# Altium PCB 触摸4B开漏.PCBDOC (part 1 of 2)
Units mm, origin at the board's own origin, x right, y up, seen from the top; angles counter-clockwise.
Board outline 63.63 x 54.48 mm, 2 copper layers (Top Layer, Bottom Layer); 18 components, 31 nets, 63 pads, 27 vias.
Unrouted connection lines stored in the file: 1.
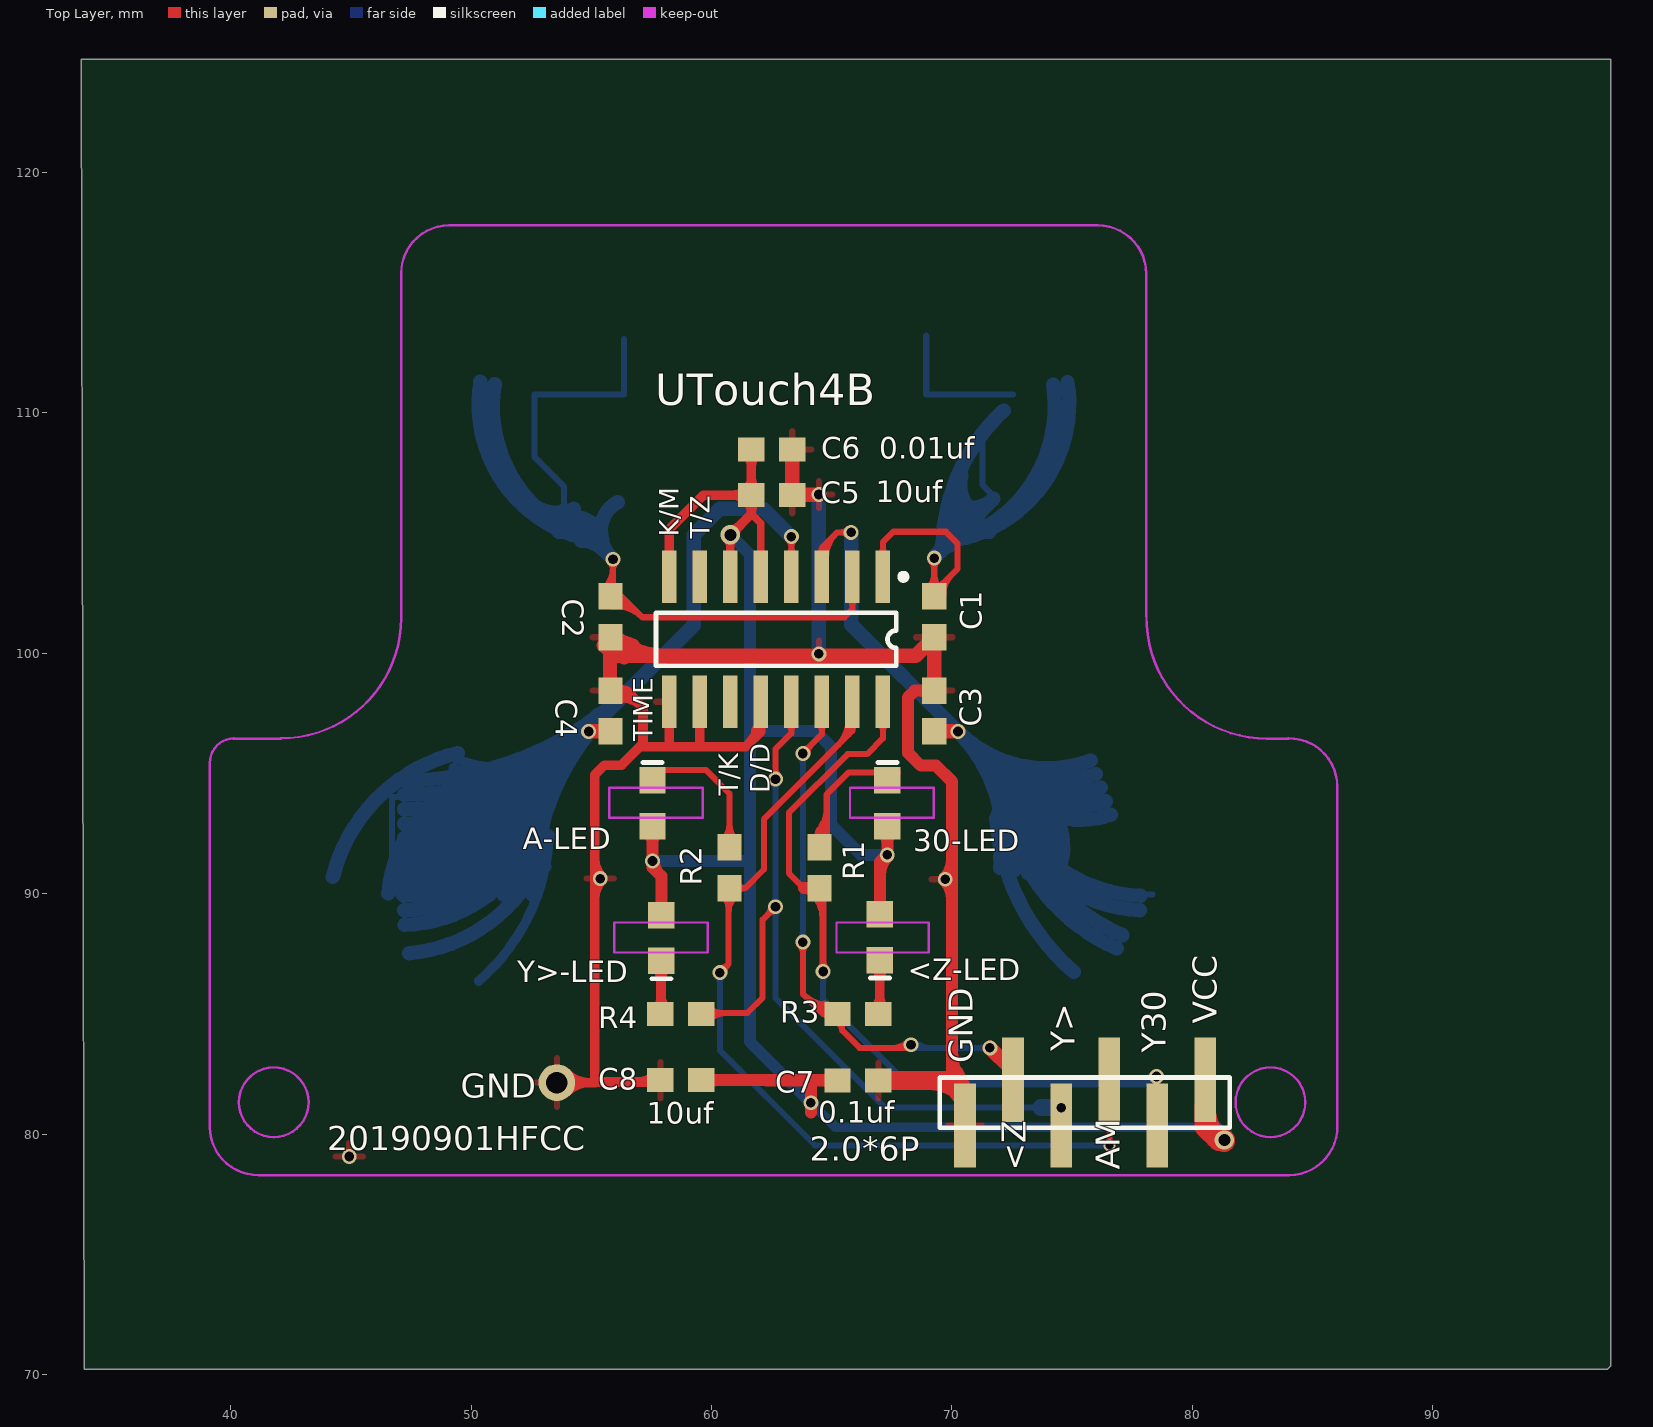
[diagram p0: Top Layer view]
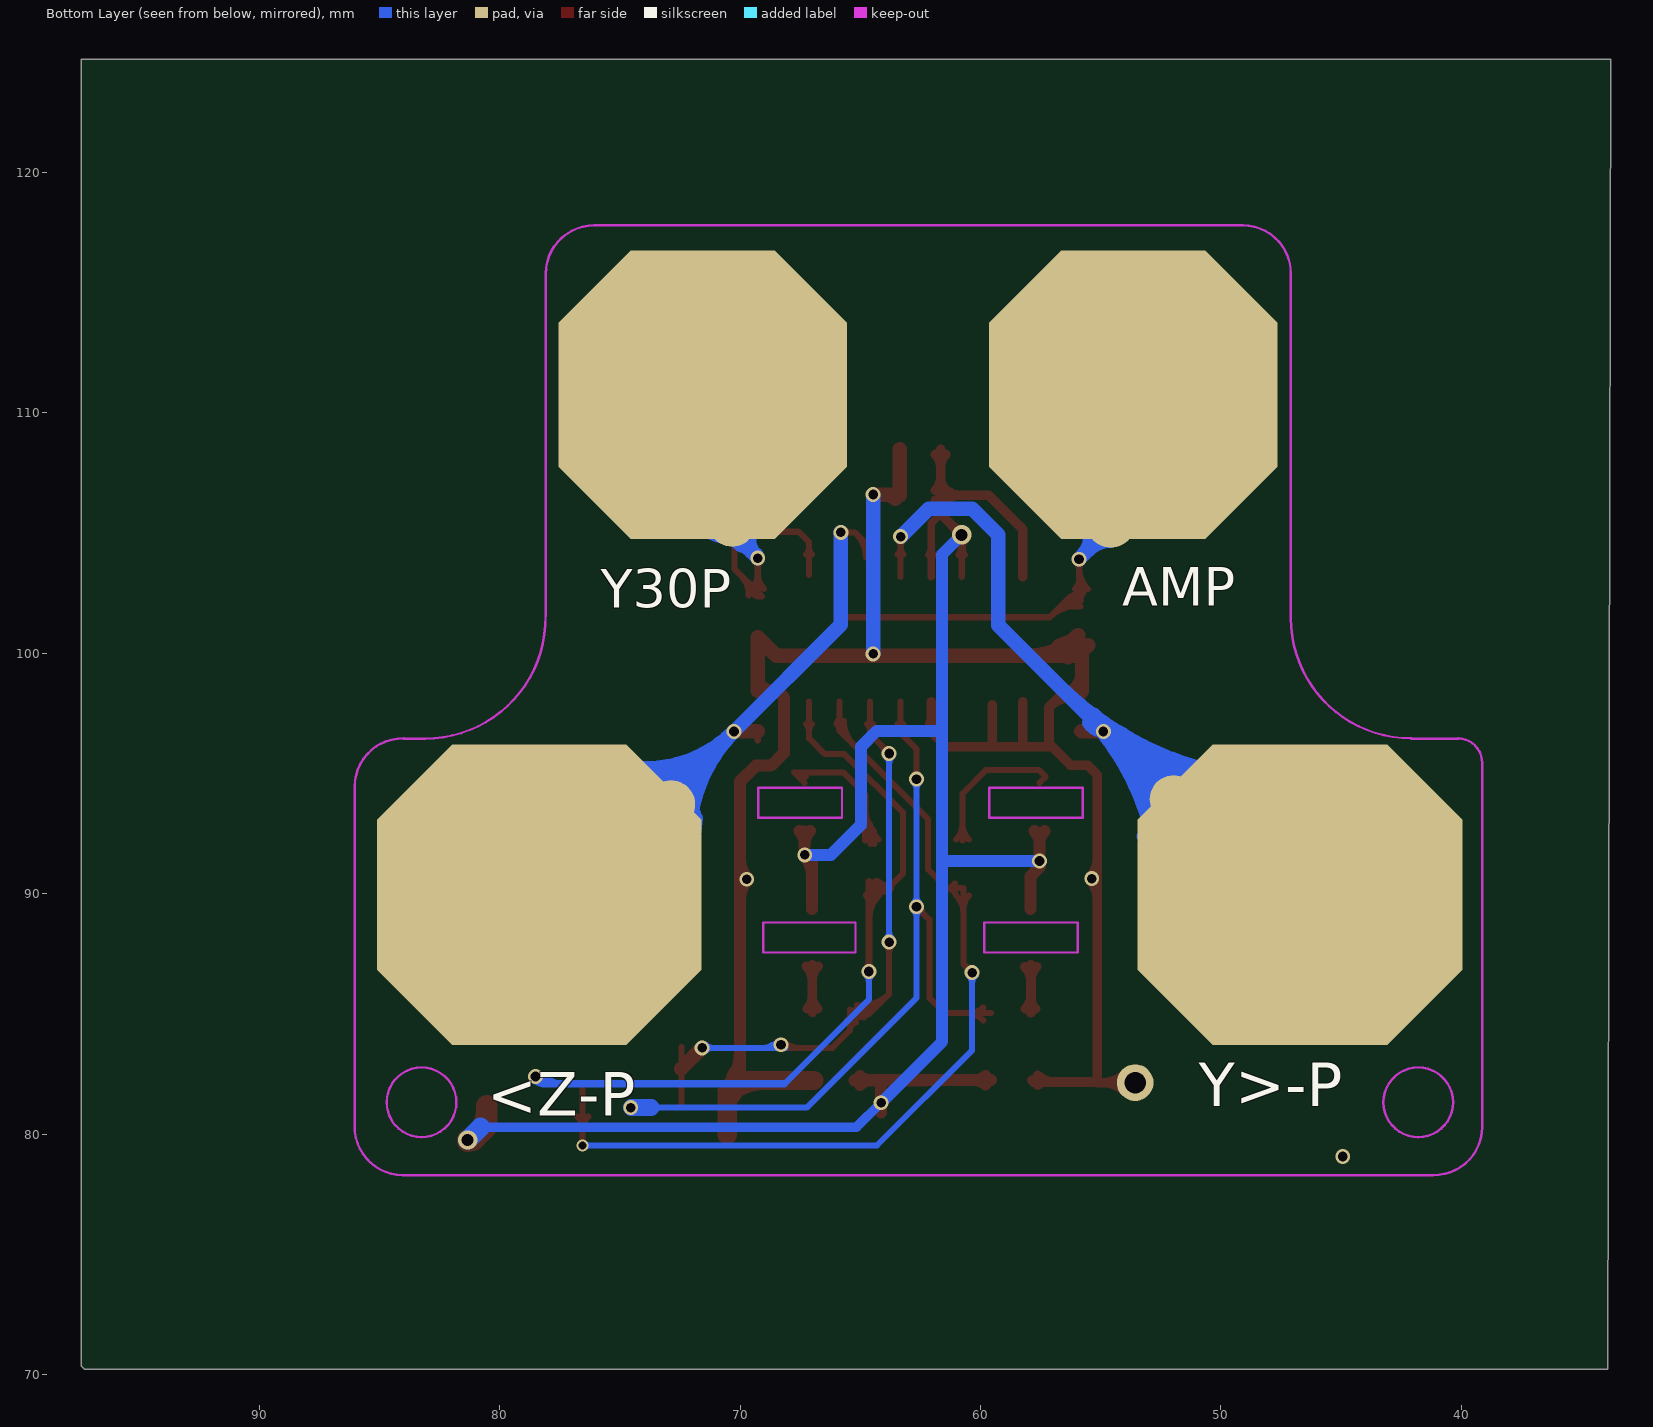
[diagram p1: Bottom Layer view, seen from below]

## Layer stack, top to bottom
Top Layer: signal copper 0.0356
Dielectric: dielectric 0.32, FR-4, Dk 4.8
Bottom Layer: signal copper 0.0356

## Board outline
33.782,124.714 97.409,124.714 97.409,70.358 97.282,70.231 33.909,70.231

## Design rules (kind name [scope] priority, off if disabled: settings)
Clearance [All] p1: gap=0.254
PolygonConnect [All] p1: connectstyle=Relief reliefconductorwidth=0.254 reliefentries=4 polygonreliefangle="90 Angle"
RoutingVias [All] p1: holewidth=0.4 width=0.62 viastyle="Through Hole" minholewidth=0.4 minwidth=0.6 maxholewidth=0.5 maxwidth=1
SilkscreenOverComponentPads [All] p1: minsilkscreentomaskgap=0.254
SolderMaskExpansion [All] p1: expansion=0.102
Width [InNet('GND')] p1: maxlimit=1 minlimit=0.254 preferedwidth=0.5 toplayer_prefwidth=0.4 minimp=50.000000 maximp=50.000000 favimp=50.000000
27 further rules are at their usual default settings.

## Components (designator, comment, footprint, x,y, rotation, side; value= is the part's Value field where it differs from the comment)
2.0*6P "PH2.0*6" MHDR1X7 76.164,81.264 r180 top locked
30-LED "CS-LED" CC1608-0603 67.315,93.764 r270 top (schematic designator LED2)
<Z-LED "BS-LED" CC1608-0603 67.005,88.189 r90 top (schematic designator LED4)
A-LED "CS-LED" CC1608-0603 57.547,93.764 r270 top (schematic designator LED1)
C1 "22P" CR1608-0603 69.266,101.517 r270 top (schematic designator C2)
C2 "22P" CR1608-0603 55.8,101.517 r270 top (schematic designator C1)
C3 "22P" CR1608-0603 69.266,97.6 r90 top locked (schematic designator C2)
C4 "22P" CR1608-0603 55.8,97.6 r90 top (schematic designator C1)
C5 "10uf" CR1608-0603 62.509,106.578 r180 top (schematic designator C4)
C6 "0.01uf" CR1608-0603 62.509,108.483 r0 top (schematic designator C4)
C7 "0.1uf" CR1608-0603 66.091,82.231 r0 top (schematic designator R1)
C8 "10uf" CR1608-0603 58.725,82.245 r180 top (schematic designator R1)
R1 "1K" CR1608-0603 64.5,91.084 r90 top
R2 "1K" CR1608-0603 60.75,91.084 r90 top
R3 "1K" CR1608-0603 66.091,85 r0 top (schematic designator R1)
R4 "1K" CR1608-0603 58.725,85 r180 top (schematic designator R2)
UTouch4B "8224" SO-G16 62.687,100.584 r180 top locked
Y>-LED "BS-LED" CC1608-0603 57.912,88.163 r90 top (schematic designator LED3)

## Footprints (in the part's own frame and the unit in brackets; to place one, negate y for a bottom-side part, rotate by r counter-clockwise, add the part's x,y. Pads: shape width x height; smd on the part's side, far side on the other; paste and mask are expansions set on the pad)
CC1608-0603 [mm]
  rect 1.1x1.1 smd: 1(-0.95,0) 2(0.95,0)
  silkscreen extent -1.7,-0.4 -1.7,0.4
CR1608-0603 [mm]
  rect 1.1x1 smd: 1(-0.85,0) 2(0.85,0)
MHDR1X7 [mm] "Connector; Header; 7 Position"
  rect 0.9x3.5 smd: 1(-4.38,-1) 2(-2.38,0.905) 3(-0.38,-1) 4(1.62,0.905) 5(3.62,-1) 6(5.62,0.905)
  silkscreen extent -5.4,-1.09 6.67,1
SO-G16 [mm] "Small Outline; 16 Leads; Body Width 3.9 mm; Pitch 1.27 mm"
  rect 0.6x2.2 smd: 1(-4.445,-2.6) 2(-3.175,-2.6) 3(-1.905,-2.6) 4(-0.635,-2.6) 5(0.635,-2.6) 6(1.905,-2.6) 7(3.175,-2.6) 8(4.445,-2.6) 9(4.445,2.6) 10(3.175,2.6) 11(1.905,2.6) 12(0.635,2.6) 13(-0.635,2.6) 14(-1.905,2.6) 15(-3.175,2.6) 16(-4.445,2.6)
  silkscreen extent -5.42,-2.72 5,1.1

## Part data
30-LED <Z-LED A-LED Y>-LED: library part LED3

## Free pads (board coordinates)
  oct 13.5x12.5 smd far side: 0(46.711,89.964) 0(78.347,89.964)
  oct 12x12 smd far side: 0(53.647,110.764) 0(71.547,110.764)
  round 2 smd far side: 1(51.968,93.929) 1(72.873,93.726) 2(54.585,105.385) 2(70.333,105.435)
  round 1.524 hole 0.9: 1(53.569,82.144)

## Via types
v1: diameter 0.62, hole 0.4, Top Layer to Bottom Layer, 24 vias
v2: diameter 0.8, hole 0.5, Top Layer to Bottom Layer, 2 vias
v3: diameter 0.5, hole 0.35, Top Layer to Bottom Layer, 1 vias

## Nets (pads, with @x,y where several pads share a name; then routed paths per layer and width w, separated by ;. In a path a pad name is that pad's centre, name@x,y a point inside that pad or via, vN(x,y) a via of type N, cw(c..) or ccw(c..) an arc to the next point about the centre after c; other vN are vias at no path point)
30Y: 2.0*6P.2 R1.1 UTouch4B.16 | length 43.6
  Top Layer w0.254: 63.842,90.234 63.221,90.856 63.221,93.37 65.659,95.809 66.472,95.809 67.132,96.469 UTouch4B.16@67.132,97.984 ; 67.132,96.766 ccw(c66.715,96.766) 67.01,97.062 cw(c66.715,96.766) 67.132,96.766 ; 67.132,96.766 cw(c67.55,96.766) 67.255,97.062 ccw(c67.55,96.766) 67.132,96.766
  Top Layer w0.3: R1.1@64.253,89.937 cw(c63.31,88.994) 64.643,88.994 ; v1(64.643,86.766) R1.1@64.643,90.514 ; R1.1@64.643,89.685 cw(c65,89.685) R1.1@64.747,89.937 ; v1@64.53,86.88 ccw(c64.257,87.153) 64.643,87.153 ; v1@64.53,86.88 ccw(c64.257,87.153) 64.643,87.153 ; v1@64.53,86.88 ccw(c64.257,87.153) 64.643,87.153 ; 64.643,87.153 ccw(c65.029,87.153) v1@64.756,86.88 ; 64.643,87.153 ccw(c65.029,87.153) v1@64.756,86.88 ; 64.643,87.153 ccw(c65.029,87.153) v1@64.756,86.88
  Top Layer w0.5: 63.842,90.234 R1.1@64.5,90.234 ; 63.896,90.234 ccw(c63.896,90.838) 64.323,90.411 cw(c63.896,90.838) 63.896,90.234 ; 63.896,90.234 cw(c63.896,89.631) 64.323,90.058 ccw(c63.896,89.631) 63.896,90.234
  Bottom Layer w0.254: v1@64.821,86.741 64.643,86.563 64.643,85.598 68.148,82.093 ; v1@64.514,86.637 cw(c64.201,86.325) 64.643,86.325 ; v1@64.514,86.637 cw(c64.201,86.325) 64.643,86.325 ; v1@64.514,86.637 cw(c64.201,86.325) 64.643,86.325 ; 64.643,86.325 cw(c65.085,86.325) v1@64.772,86.637 ; 64.643,86.325 cw(c65.085,86.325) v1@64.772,86.637 ; 64.643,86.325 cw(c65.085,86.325) v1@64.772,86.637
  Bottom Layer w0.3: 68.148,82.093 78.207,82.093 v1(78.511,82.398) ; 77.836,82.186 cw(c78.214,81.532) v1@78.459,82.246 ; 77.389,82.093 ccw(c77.389,83.52) 78.398,82.511 cw(c77.389,83.52) 77.389,82.093 ; 78.114,82.093 ccw(c78.114,82.795) 78.61,82.299 cw(c78.114,82.795) 78.114,82.093
30Y-R: 30-LED.1 R1.2 | length 13.4
  Top Layer w0.254: R1.2@64.403,92.345 ccw(c64.272,92.835) 64.712,92.581 ; 64.474,92.661 ccw(c64.876,92.429) R1.2@64.577,92.075 ; 64.626,92.924 ccw(c65.075,92.665) R1.2@64.741,92.269 ; 64.718,92.592 ccw(c64.964,92.45) R1.2@64.763,92.248 ; R1.2@64.795,92.214 64.795,94.132 65.71,95.047 67.748,95.047 30-LED.1@67.315,94.614 ; 30-LED.1@67.265,94.889 30-LED.1@67.589,94.889 ; R1.2@64.236,92.248 ccw(c62.886,93.598) 64.795,93.598 cw(c62.886,93.598) R1.2@64.236,92.248 ; R1.2@64.416,92.069 ccw(c63.5,92.985) 64.795,92.985 cw(c63.5,92.985) R1.2@64.416,92.069
<Z: 2.0*6P.5 R3.1 UTouch4B.14 | length 60.5
  Top Layer w0.254: v1(63.8,87.986) 63.8,85.831 ; v1(63.8,95.834) 64.592,96.626 UTouch4B.14@64.592,97.984 ; 64.589,85.199 ccw(c64.659,85.702) R3.1@64.966,85.297 ; R3.1@64.7,85.184 cw(c64.624,84.632) R3.1@65.091,84.935 ; R3.1@64.701,85.431 cw(c64.578,84.536) R3.1@65.298,85.081 ; R3.1@65.185,84.642 cw(c65.088,84.314) 65.43,84.314 ; 65.43,84.436 cw(c65.854,84.436) R3.1@65.555,84.736 ; 67.552,83.591 ccw(c67.552,84.467) v1@68.171,83.848 ; v1(68.301,83.718) 68.174,83.591 66.167,83.591 65.43,84.328 65.43,85.19 R3.1@65.241,85 64.631,85 ; 2.0*6P.5@72.441,81.128 72.441,82.728 2.0*6P.5@72.441,83.617 ; v1@63.671,87.856 cw(c63.358,87.544) 63.8,87.544 ; v1@63.671,87.856 cw(c63.358,87.544) 63.8,87.544 ; v1@63.671,87.856 cw(c63.358,87.544) 63.8,87.544 ; 63.8,85.831 ccw(c64.944,86.975) 65.145,85.37 cw(c64.944,86.975) 63.8,85.831 ; 63.8,85.831 64.631,85 ; 63.8,87.544 cw(c64.242,87.544) v1@63.929,87.856 ; 63.8,87.544 cw(c64.242,87.544) v1@63.929,87.856 ; 63.8,87.544 cw(c64.242,87.544) v1@63.929,87.856 ; v1@63.8,96.017 ccw(c63.8,96.459) 64.112,96.147 ; v1@63.8,96.017 ccw(c63.8,96.459) 64.112,96.147 ; v1@63.8,96.017 ccw(c63.8,96.459) 64.112,96.147 ; v1@63.8,96.017 ccw(c63.8,96.458) 64.112,96.147 ; v1@63.8,96.017 ccw(c63.8,96.458) 64.112,96.146 ; v1@63.801,96.017 ccw(c63.802,96.453) 64.11,96.144 ; v1@63.801,96.017 ccw(c63.802,96.453) 64.11,96.144 ; v1@63.801,96.017 ccw(c63.805,96.447) 64.11,96.144 ; v1@63.8,96.017 ccw(c63.802,96.455) 64.112,96.147 ; v1@63.801,96.017 ccw(c63.802,96.453) 64.11,96.144 ; v1@63.801,96.017 ccw(c63.802,96.453) 64.11,96.144 ; v1@63.801,96.017 ccw(c63.805,96.447) 64.11,96.144 ; v1@63.8,96.017 ccw(c63.802,96.455) 64.112,96.147 ; v1@63.801,96.017 ccw(c63.804,96.45) 64.11,96.144 ; v1@63.801,96.017 ccw(c63.803,96.451) 64.11,96.144 ; v1@63.801,96.017 ccw(c63.805,96.447) 64.11,96.144 ; v1@63.8,96.017 ccw(c63.802,96.455) 64.112,96.147 ; v1@63.801,96.017 ccw(c63.802,96.453) 64.11,96.144 ; v1@63.801,96.017 ccw(c63.802,96.453) 64.11,96.144 ; v1@63.983,95.834 cw(c64.425,95.834) 64.112,96.147 ; v1@63.983,95.835 cw(c64.421,95.836) 64.112,96.147 ; v1@63.983,95.834 cw(c64.425,95.834) 64.112,96.147 ; v1@63.983,95.835 cw(c64.421,95.836) 64.112,96.147 ; v1@63.983,95.834 cw(c64.425,95.834) 64.112,96.147 ; v1@63.983,95.834 cw(c64.424,95.835) 64.112,96.146 ; v1@63.983,95.834 cw(c64.424,95.834) 64.112,96.147 ; v1@63.983,95.835 cw(c64.421,95.836) 64.112,96.147 ; v1@63.983,95.836 cw(c64.413,95.839) 64.11,96.144 ; v1@63.983,95.835 cw(c64.419,95.836) 64.11,96.144 ; v1@63.983,95.835 cw(c64.419,95.836) 64.11,96.144 ; v1@63.983,95.836 cw(c64.413,95.839) 64.11,96.144 ; v1@63.983,95.835 cw(c64.419,95.836) 64.11,96.144 ; v1@63.983,95.835 cw(c64.419,95.836) 64.11,96.144 ; v1@63.983,95.835 cw(c64.417,95.837) 64.11,96.144 ; v1@63.983,95.835 cw(c64.416,95.838) 64.11,96.144 ; v1@63.983,95.835 cw(c64.419,95.836) 64.11,96.144 ; v1@63.983,95.835 cw(c64.419,95.836) 64.11,96.144 ; v1@63.983,95.836 cw(c64.413,95.839) 64.11,96.144 ; 64.592,96.766 ccw(c64.175,96.766) 64.47,97.062 cw(c64.175,96.766) 64.592,96.766 ; 64.592,96.766 cw(c65.01,96.766) 64.715,97.062 ccw(c65.01,96.766) 64.592,96.766 ; 64.631,85 ccw(c64.631,85.233) 64.846,85.143 cw(c64.631,85.233) 64.631,85 ; 64.631,85 cw(c64.631,84.767) 64.846,84.857 ccw(c64.631,84.767) 64.631,85 ; 64.167,85.464 ccw(c65.025,86.322) 65.176,85.118 cw(c65.025,86.322) 64.167,85.464 ; 64.534,85.097 ccw(c65.107,85.67) 65.208,84.866 cw(c65.107,85.67) 64.534,85.097
  Top Layer w0.6: v1(71.577,83.591) 2.0*6P.5@72.441,82.728
  Bottom Layer w0.254: v1(63.8,87.986) v1(63.8,95.834) ; v1(68.301,83.718) 68.25,83.718 68.123,83.591 v1(71.577,83.591) ; v1@68.449,83.611 cw(c68.625,83.484) 68.734,83.672 ; v1@63.671,88.115 ccw(c63.358,88.427) 63.8,88.427 ; v1@63.671,88.115 ccw(c63.358,88.427) 63.8,88.427 ; v1@63.671,88.115 ccw(c63.358,88.427) 63.8,88.427 ; v1@63.671,95.705 cw(c63.358,95.392) 63.8,95.392 ; v1@63.671,95.705 cw(c63.358,95.392) 63.8,95.392 ; v1@63.671,95.705 cw(c63.358,95.392) 63.8,95.392 ; 63.8,88.427 ccw(c64.242,88.427) v1@63.929,88.115 ; 63.8,88.427 ccw(c64.242,88.427) v1@63.929,88.115 ; 63.8,88.427 ccw(c64.242,88.427) v1@63.929,88.115 ; 63.8,95.392 cw(c64.242,95.392) v1@63.929,95.705 ; 63.8,95.392 cw(c64.242,95.392) v1@63.929,95.705 ; 63.8,95.392 cw(c64.242,95.392) v1@63.929,95.705 ; 71.135,83.591 ccw(c71.135,84.033) 71.448,83.721 cw(c71.135,84.033) 71.135,83.591 ; 71.135,83.591 cw(c71.135,83.15) 71.448,83.462 ccw(c71.135,83.15) 71.135,83.591 ; v1@68.43,83.848 ccw(c69.049,84.467) 69.049,83.591 cw(c69.049,84.467) v1@68.43,83.848
<Z-P: C3.1 pad.0@78.347,89.964 pad.1@72.873,93.726 UTouch4B.3 | length 329.2
  Top Layer w0.254: UTouch4B.3@64.506,104.134 ccw(c64.012,104.99) 64.966,104.734 ; UTouch4B.3@64.592,103.184 64.592,104.394 ; v1(65.811,105.029) 65.227,105.029 64.592,104.394 ; C3.1@69.266,96.368 C3.1@69.266,96.75 ; 64.592,104.394 ccw(c64.992,104.394) 64.713,104.108 cw(c64.992,104.394) 64.592,104.394 ; 64.592,104.394 cw(c64.193,104.394) 64.471,104.108 ccw(c64.193,104.394) 64.592,104.394 ; 65.37,105.029 cw(c65.37,104.587) v1@65.682,104.9 ; 65.37,105.029 ccw(c65.37,105.471) v1@65.682,105.158 ; 65.37,105.029 ccw(c65.37,105.471) v1@65.682,105.158 ; 65.37,105.029 cw(c65.37,104.587) v1@65.682,104.9 ; 65.37,105.029 ccw(c65.37,105.471) v1@65.682,105.158 ; 65.37,105.029 cw(c65.37,104.587) v1@65.682,104.9 ; UTouch4B.3@64.511,103.984 cw(c65.305,103.984) 64.744,104.546 ccw(c65.305,103.984) UTouch4B.3@64.511,103.984 ; UTouch4B.3@64.765,103.984 cw(c66.173,103.984) 65.177,104.979 ccw(c66.173,103.984) UTouch4B.3@64.765,103.984
  Top Layer w0.6: C3.1@69.266,96.75 v1(70.256,96.75)
  Bottom Layer w0.254: v1@65.682,104.9 cw(c65.37,104.587) 65.811,104.587 cw(c66.253,104.587) v1@65.941,104.9 ; pad.0@74.016,94.539 74.016,89.964 pad.0@78.347,89.964
  Bottom Layer w0.4: pad.1@72.644,93.345 pad.1@72.644,94.362
  Bottom Layer w0.6: v1(65.811,105.029) 65.811,101.195 v1(70.256,96.75) ; 71.614,95.131 cw(c71.054,93.49) pad.1@72.773,93.713 ; 71.696,94.613 cw(c71.117,93.73) pad.1@72.173,93.728 ; 71.707,94.606 ccw(c72.453,95.743) pad.1@72.73,94.411 ; 71.718,94.77 ccw(c73.888,95.079) pad.1@72.573,93.326 ; 71.82,95.042 ccw(c73.581,95.514) 72.909,93.819 cw(c73.469,95.228) 71.993,94.88 ; 71.83,95.057 ccw(c73.966,99.015) pad.0@75.739,94.881 ; 71.844,94.621 cw(c71.432,93.273) pad.1@72.777,93.696 ; pad.0@71.85,93.147 ccw(c81.187,93.834) pad.0@75.07,86.746 ; 71.917,94.682 ccw(c78.139,96.349) pad.0@77.844,89.914 ; pad.0@71.923,93.336 ccw(c72.659,93.441) pad.0@72.212,92.846 ; 71.982,94.976 cw(c71.306,94.288) pad.1@72.214,93.962 ; 71.985,94.973 cw(c70.611,92.427) pad.0@73.35,91.495 ; 72.001,94.849 ccw(c80.645,96.285) pad.0@77.098,88.272 ; 72.117,94.902 cw(c71.522,93.8) pad.1@72.773,93.731 ; pad.1@72.129,93.889 ccw(c78.099,95.489) pad.0@77.817,89.314 ; pad.0@72.145,92.294 ccw(c71.013,92.958) pad.1@72.226,93.459 ; pad.1@72.155,94.312 cw(c71.095,92.695) pad.0@72.887,91.97 ; pad.1@72.183,93.751 ccw(c80.106,95.068) pad.0@76.855,87.724 ; pad.0@72.219,92.421 cw(c73.392,91.732) pad.1@73.049,93.049 ; pad.1@72.271,94.236 ccw(c73.446,96.028) pad.0@74.704,94.294 ; 72.314,94.65 ccw(c72.861,95.206) pad.1@72.867,94.426 ; 72.315,94.732 cw(c71.958,93.966) pad.1@72.776,93.751 ; pad.0@72.333,92.285 cw(c74.289,92.235) pad.1@72.941,93.653 ; pad.1@72.425,93.188 cw(c70.75,91.175) pad.0@73.357,91.414 ; pad.1@72.482,94.038 cw(c73.688,93.075) pad.0@73.516,94.609 ; 72.528,94.819 cw(c72.121,93.628) pad.1@73.368,93.79 ; pad.0@72.607,92.566 cw(c73.5,92.885) pad.1@72.932,93.646 ; pad.1@72.61,94.636 cw(c71.292,92.195) pad.0@73.918,91.301 ; pad.1@72.644,94.362 v1(70.256,96.75) ; pad.1@72.766,93.911 cw(c71.786,92.416) pad.0@73.443,91.745 ; pad.0@72.88,91.801 cw(c74.009,92.205) pad.1@73.291,93.165 ; pad.0@72.887,92.468 cw(c73.974,93.009) pad.1@72.956,93.671 ; pad.1@72.923,94.467 ccw(c74.591,97.558) pad.0@75.975,94.33 ; pad.0@72.94,92.441 cw(c74.014,93.042) pad.1@72.958,93.675 ; pad.1@72.951,93.664 cw(c75.288,91.796) pad.0@74.956,94.77 ; pad.1@72.967,93.693 cw(c74.422,93.184) pad.0@73.955,94.653 ; pad.1@73.052,94.403 ccw(c73.451,95.902) pad.0@74.338,94.629 ; pad.1@73.234,94.299 cw(c71.973,91.963) pad.0@74.486,91.108 ; pad.0@73.238,92.722 cw(c73.996,92.791) pad.1@73.411,93.278 ; pad.1@73.306,94.275 ccw(c73.671,94.737) 73.958,94.224 ccw(c74.338,93.547) pad.1@73.567,93.641 ; pad.0@73.354,91.529 cw(c74.994,92.344) pad.1@73.459,93.344 ; pad.0@73.446,91.538 cw(c75.037,92.429) pad.1@73.473,93.366 ; pad.1@73.48,93.378 ccw(c74.707,92.676) pad.0@73.483,91.969 ; pad.1@73.562,93.603 cw(c74.901,93.363) pad.0@74.123,94.479 ; v1@70.257,96.75 ccw(c73.959,100.452) 75.778,95.543 cw(c73.959,100.452) v1@70.257,96.75 ; v1@70.257,96.75 cw(c65.773,92.266) 72.002,91.078 ccw(c65.773,92.266) v1@70.257,96.75 ; 71.184,95.744 ccw(c73.723,97.309) pad.1@73.034,94.407 ; 71.184,95.744 ccw(c73.723,97.309) pad.1@73.034,94.407 ; 71.184,95.744 ccw(c73.723,97.309) pad.1@73.034,94.407 ; 71.294,95.61 cw(c70.252,93.981) pad.1@72.176,93.794 ; 71.294,95.61 cw(c70.252,93.981) pad.1@72.176,93.794 ; 71.294,95.61 cw(c70.252,93.981) pad.1@72.176,93.794 ; 71.87,95.132 ccw(c73.297,96.13) pad.1@72.994,94.415 ; 71.87,95.132 ccw(c73.297,96.13) pad.1@72.994,94.415 ; 71.87,95.132 ccw(c73.297,96.13) pad.1@72.994,94.415 ; 71.912,95.072 cw(c70.57,94.132) pad.1@72.183,93.848 ; 71.912,95.072 cw(c70.57,94.132) pad.1@72.183,93.848 ; 71.912,95.072 cw(c70.57,94.132) pad.1@72.183,93.848 ; 71.944,94.511 ccw(c73.25,95.316) pad.1@72.896,93.823 ; 71.944,94.511 ccw(c73.25,95.316) pad.1@72.896,93.823 ; 71.944,94.511 ccw(c73.25,95.316) pad.1@72.896,93.823 ; pad.0@72.004,91.432 cw(c75.157,91.41) pad.1@72.943,93.655 ; pad.0@72.004,91.432 cw(c75.157,91.41) pad.1@72.943,93.655 ; pad.0@72.004,91.432 cw(c75.157,91.41) pad.1@72.943,93.655 ; pad.0@72.014,92.88 cw(c73.718,92.869) pad.1@72.521,94.082 ; pad.0@72.014,92.88 cw(c73.718,92.869) pad.1@72.521,94.082 ; pad.0@72.014,92.88 cw(c73.718,92.869) pad.1@72.521,94.082 ; 72.119,95.082 cw(c71.347,93.875) pad.1@72.773,93.736 ; 72.119,95.082 cw(c71.347,93.875) pad.1@72.773,93.736 ; 72.119,95.082 cw(c71.347,93.875) pad.1@72.773,93.736 ; 72.154,94.833 cw(c71.815,94.397) pad.1@72.282,94.101 ; 72.154,94.833 cw(c71.815,94.397) pad.1@72.282,94.101 ; 72.154,94.833 cw(c71.815,94.397) pad.1@72.282,94.101 ; 72.173,95.231 cw(c71.631,93.564) pad.1@73.368,93.79 ; 72.173,95.231 cw(c71.631,93.564) pad.1@73.368,93.79 ; 72.173,95.231 cw(c71.631,93.564) pad.1@73.368,93.79 ; pad.1@72.445,93.172 cw(c71.515,91.966) pad.0@73.025,92.161 ; pad.1@72.445,93.172 cw(c71.515,91.966) pad.0@73.025,92.161 ; pad.1@72.445,93.172 cw(c71.515,91.966) pad.0@73.025,92.161 ; pad.1@72.49,94.048 cw(c73.935,92.83) pad.0@73.775,94.713 ; pad.1@72.49,94.048 cw(c73.935,92.83) pad.0@73.775,94.713 ; pad.1@72.49,94.048 cw(c73.935,92.83) pad.0@73.775,94.713 ; pad.1@72.838,93.027 cw(c72.783,91.923) pad.0@73.74,92.476 ; pad.1@72.838,93.027 cw(c72.783,91.923) pad.0@73.74,92.476 ; pad.1@72.838,93.027 cw(c72.783,91.923) pad.0@73.74,92.476 ; pad.1@72.942,93.654 cw(c74.593,91.962) pad.0@74.732,94.322 ; pad.1@72.942,93.654 cw(c74.593,91.962) pad.0@74.732,94.322 ; pad.1@72.942,93.654 cw(c74.593,91.962) pad.0@74.732,94.322 ; pad.1@72.949,93.662 cw(c75.501,91.509) pad.0@75.219,94.836 ; pad.1@72.949,93.662 cw(c75.501,91.509) pad.0@75.219,94.836 ; pad.1@72.949,93.662 cw(c75.501,91.509) pad.0@75.219,94.836 ; pad.0@73.055,91.926 cw(c74.897,92.164) pad.1@73.427,93.298 ; pad.0@73.055,91.926 cw(c74.897,92.164) pad.1@73.427,93.298 ; pad.0@73.055,91.926 cw(c74.897,92.164) pad.1@73.427,93.298 ; pad.1@73.332,93.198 cw(c73.886,92.56) pad.0@74.309,93.292 ; pad.1@73.332,93.198 cw(c73.886,92.56) pad.0@74.309,93.292 ; pad.1@73.332,93.198 cw(c73.886,92.56) pad.0@74.309,93.292 ; pad.1@73.485,93.387 cw(c74.353,92.907) pad.0@74.532,93.883 ; pad.1@73.485,93.387 cw(c74.353,92.907) pad.0@74.532,93.883 ; pad.1@73.485,93.387 cw(c74.353,92.907) pad.0@74.532,93.883 ; pad.1@73.549,93.545 ccw(c74.764,93.219) pad.0@73.674,92.59 ; pad.1@73.549,93.545 ccw(c74.764,93.219) pad.0@73.674,92.59 ; pad.1@73.549,93.545 ccw(c74.764,93.219) pad.0@73.674,92.59 ; 70.918,96.088 ccw(c74.317,99.486) 75.987,94.98 cw(c74.317,99.486) 70.918,96.088 ; 71.058,95.948 cw(c67.119,92.009) 72.591,90.966 ccw(c67.119,92.009) 71.058,95.948 ; 71.389,95.617 cw(c69.498,93.726) 72.173,93.726 ccw(c69.498,93.726) 71.389,95.617 ; 71.58,95.427 ccw(c74.674,98.521) 76.196,94.418 cw(c74.674,98.521) 71.58,95.427 ; 71.86,95.147 cw(c68.465,91.752) 73.181,90.853 ccw(c68.465,91.752) 71.86,95.147 ; 72.242,94.765 ccw(c75.032,97.556) 76.404,93.855 cw(c75.032,97.556) 72.242,94.765 ; 72.374,94.633 ccw(c72.873,95.131) 72.873,94.426 cw(c72.873,95.131) 72.374,94.633 ; pad.1@72.661,94.345 cw(c69.811,91.496) 73.77,90.741 ccw(c69.811,91.496) pad.1@72.661,94.345 ; pad.1@72.903,94.103 ccw(c75.39,96.59) 76.613,93.292 cw(c75.39,96.59) pad.1@72.903,94.103
>1-1: <Z-LED.1 R3.2 | length 7
  Top Layer w0.254: R3.2@66.941,85 R3.2@67.005,85.064
  Top Layer w0.4: R3.2@67.005,85.064 <Z-LED.1@67.005,87.046 ; 67.005,86.394 ccw(c66.16,86.394) 66.758,86.991 cw(c66.16,86.394) 67.005,86.394 ; 67.005,86.394 cw(c67.85,86.394) 67.253,86.991 ccw(c67.85,86.394) 67.005,86.394 ; R3.2@66.779,85.212 ccw(c66.232,85.759) 67.005,85.759 cw(c66.232,85.759) R3.2@66.779,85.212 ; 67.005,85.689 ccw(c67.68,85.689) 67.203,85.212 cw(c67.68,85.689) 67.005,85.689
>2-1: R4.2 Y>-LED.1 | length 7
  Top Layer w0.254: R4.2@57.875,85.014 R4.2@57.903,85.042
  Top Layer w0.4: R4.2@57.903,85.042 Y>-LED.1@57.903,87.046 ; Y>-LED.1@57.665,86.966 cw(c57.09,86.391) 57.903,86.391 ccw(c57.09,86.391) Y>-LED.1@57.665,86.966 ; R4.2@57.713,85.212 ccw(c57.254,85.671) 57.903,85.671 cw(c57.254,85.671) R4.2@57.713,85.212 ; 57.903,85.778 ccw(c58.703,85.778) 58.137,85.212 cw(c58.703,85.778) 57.903,85.778 ; 57.903,86.346 cw(c58.78,86.346) 58.159,86.966 ccw(c58.78,86.346) 57.903,86.346
AHLB: 
AM: 2.0*6P.3 R2.1 UTouch4B.15 | length 56.4
  Top Layer w0.254: v1(60.35,86.716) 60.706,87.071 R2.1@60.706,90.234 ; R2.1@60.486,89.921 cw(c59.956,89.39) 60.706,89.39 ; 60.706,89.178 cw(c61.757,89.178) R2.1@61.014,89.921 ; R2.1@60.75,90.234 61.405,90.234 ; 65.488,96.434 cw(c66.443,96.178) UTouch4B.15@65.949,97.034 ; UTouch4B.15@65.862,97.984 65.862,96.774 ; v3(76.556,79.527) 2.0*6P.3@76.556,81.89 ; v1@60.35,86.899 ccw(c60.35,87.34) 60.663,87.028 ; v1@60.35,86.899 ccw(c60.35,87.34) 60.663,87.028 ; v1@60.351,86.899 ccw(c60.352,87.336) 60.663,87.028 ; v1@60.352,86.899 ccw(c60.355,87.328) 60.66,87.026 ; v1@60.351,86.899 ccw(c60.353,87.335) 60.66,87.025 ; v1@60.351,86.899 ccw(c60.353,87.335) 60.66,87.025 ; v1@60.533,86.716 cw(c60.975,86.716) 60.663,87.028 ; v1@60.533,86.716 cw(c60.975,86.716) 60.663,87.028 ; v1@60.533,86.716 cw(c60.971,86.717) 60.663,87.028 ; v1@60.533,86.716 cw(c60.97,86.718) 60.66,87.025 ; v1@60.533,86.716 cw(c60.97,86.718) 60.66,87.025 ; v1@60.533,86.717 cw(c60.963,86.721) 60.66,87.026 ; 61.405,90.234 ccw(c61.405,89.845) 61.071,90.044 cw(c61.405,89.845) 61.405,90.234 ; 61.405,90.234 cw(c61.405,90.624) 61.071,90.425 ccw(c61.405,90.624) 61.405,90.234 ; 61.405,90.234 62.179,91.008 62.179,93.091 65.862,96.774 ; 65.862,96.774 ccw(c65.463,96.774) 65.741,97.06 cw(c65.463,96.774) 65.862,96.774 ; 65.862,96.774 cw(c66.262,96.774) 65.983,97.06 ccw(c66.262,96.774) 65.862,96.774 ; 76.556,79.824 ccw(c76.853,79.824) 76.643,79.614 cw(c76.853,79.824) 76.556,79.824 ; 76.556,79.824 cw(c76.259,79.824) 76.469,79.614 ccw(c76.259,79.824) 76.556,79.824 ; 65.277,96.189 ccw(c64.282,97.184) 65.689,97.184 cw(c64.282,97.184) 65.277,96.189 ; 65.711,96.622 ccw(c65.149,97.184) 65.943,97.184 cw(c65.149,97.184) 65.711,96.622 ; 2.0*6P.3@76.315,80.736 cw(c75.735,80.155) 76.556,80.155 ccw(c75.735,80.155) 2.0*6P.3@76.315,80.736 ; 76.556,80.213 cw(c77.294,80.213) 76.772,80.736 ccw(c77.294,80.213) 76.556,80.213
  Bottom Layer w0.254: v1(60.35,86.716) 60.35,83.49 64.313,79.527 v3(76.556,79.527) ; v1@60.221,86.586 cw(c59.909,86.274) 60.35,86.274 ; v1@60.221,86.586 cw(c59.909,86.274) 60.35,86.274 ; v1@60.221,86.586 cw(c59.909,86.274) 60.35,86.274 ; 60.35,86.274 cw(c60.792,86.274) v1@60.48,86.586 ; 60.35,86.274 cw(c60.792,86.274) v1@60.48,86.586 ; 60.35,86.274 cw(c60.792,86.274) v1@60.48,86.586 ; 76.259,79.527 ccw(c76.259,79.824) 76.469,79.614 cw(c76.259,79.824) 76.259,79.527 ; 76.259,79.527 cw(c76.259,79.23) 76.469,79.44 ccw(c76.259,79.23) 76.259,79.527
AM-P: C2.1 pad.0@53.647,110.764 pad.2@54.585,105.385 UTouch4B.2 | length 72.4
  Top Layer w0.254: C2.1@55.536,102.681 ccw(c54.645,103.572) 55.905,103.572 ; C2.1@55.716,102.502 ccw(c55.258,102.959) 55.905,102.959 ; C2.1@55.785,102.452 cw(c55.866,101.731) 56.379,102.244 ; C2.1@55.8,102.367 55.905,102.473 v1(55.905,103.911) ; C2.1@55.813,102.199 cw(c55.942,101.062) 56.752,101.871 ; C2.1@55.842,101.947 cw(c56.018,100.392) 57.125,101.498 ; 55.905,103.063 ccw(c56.446,103.063) C2.1@56.064,102.681 ; C2.1@56.007,102.367 56.256,102.367 57.125,101.498 ; UTouch4B.2@65.862,103.184 65.862,101.829 65.532,101.498 57.125,101.498 ; v1@55.776,103.782 cw(c55.464,103.47) 55.905,103.47 ; v1@55.776,103.782 cw(c55.464,103.47) 55.905,103.47 ; v1@55.776,103.782 cw(c55.464,103.47) 55.905,103.47 ; 55.905,103.47 cw(c56.347,103.47) v1@56.035,103.782 ; 55.905,103.47 cw(c56.347,103.47) v1@56.035,103.782 ; 55.905,103.47 cw(c56.347,103.47) v1@56.035,103.782 ; 65.862,101.966 ccw(c65.445,101.966) 65.74,102.262 cw(c65.445,101.966) 65.862,101.966 ; 65.862,101.966 cw(c66.28,101.966) 65.985,102.262 ccw(c66.28,101.966) 65.862,101.966
  Bottom Layer w0.254: pad.2@53.873,105.943 53.873,106.934 52.647,108.161 52.647,110.764 56.363,110.764 pad.0@56.363,113.081
  Bottom Layer w0.6: pad.0@50.39,111.294 ccw(c56.067,110.37) pad.2@54.578,104.814 ; pad.0@50.982,111.197 ccw(c56.725,110.263) pad.2@55.219,104.642 ; pad.0@52.351,106.069 ccw(c53.367,107.872) pad.2@54.277,106.013 ; pad.0@52.774,106.055 ccw(c53.563,107.422) pad.2@54.271,106.01 ; pad.0@53.345,105.509 ccw(c53.976,106.628) pad.2@54.541,105.474 ; pad.2@53.873,105.943 v1(55.905,103.911) ; pad.2@54.096,105.684 cw(c54.21,104.394) 55.46,104.729 ; pad.2@54.558,105.288 cw(c54.156,103.858) 55.591,104.243 ; pad.0@55.448,104.776 cw(c56.734,105.121) pad.0@56.095,106.29 ; pad.2@53.647,105.064 cw(c53.647,102.394) 55.535,104.282 ccw(c53.647,102.394) pad.2@53.647,105.064 ; pad.2@54.585,104.685 cw(c54.585,103.363) 55.519,104.297 ccw(c54.585,103.363) pad.2@54.585,104.685 ; pad.2@55.285,105.385 ccw(c57.342,105.385) 55.887,103.929 cw(c57.342,105.385) pad.2@55.285,105.385
AM-R: A-LED.1 R2.2 | length 9.1
  Top Layer w0.254: A-LED.1@57.547,94.614 57.291,94.869 57.571,95.148 59.766,95.148 60.75,94.165 R2.2@60.75,92.214 ; 60.75,92.885 ccw(c61.651,92.885) 61.014,92.248 cw(c61.651,92.885) 60.75,92.885 ; 60.75,92.885 cw(c59.85,92.885) 60.486,92.248 ccw(c59.85,92.885) 60.75,92.885
D1: 
D2: 
GND: 2.0*6P.6 C1.2 C2.2 C3.2 C4.2 C5.1 C6.2 C7.2 C8.2 pad.1@53.569,82.144 UTouch4B.9 UTouch4B.10 UTouch4B.11 UTouch4B.12 | length 135
  Top Layer w0.254: C5.1@63.359,106.578 C5.1@63.385,106.604
  Top Layer w0.4: pad.1@53.569,82.144 55.169,82.144 55.143,82.169 ; 55.21,90.134 ccw(c54.693,90.432) v1@55.266,90.597 ; 55.21,91.121 cw(c54.693,90.823) v1@55.266,90.658 ; C4.2@55.729,98.33 ccw(c56.261,98.856) C4.2@56.257,98.108 ; C4.2@55.753,98.45 56.465,98.45 ; 57.15,96.114 61.417,96.114 62.052,96.749 UTouch4B.12@62.052,97.984 ; C8.2@57.875,82.245 57.799,82.169 55.143,82.169 ; UTouch4B.9@58.242,97.984 58.242,96.19 58.268,96.164 ; 59.512,96.139 UTouch4B.10@59.512,97.857 ; 61.836,96.751 cw(c62.388,96.603) UTouch4B.12@62.102,97.097 ; 54.925,82.144 ccw(c54.925,80.787) 53.966,81.746 cw(c54.925,80.787) 54.925,82.144 ; 54.925,82.144 cw(c54.925,83.5) 53.966,82.541 ccw(c54.925,83.5) 54.925,82.144 ; 55.143,82.169 55.143,94.945 55.55,95.352 56.261,95.352 57.15,96.241 57.15,97.765 ; 56.465,98.45 ccw(c56.465,97.864) 56.025,98.252 cw(c56.465,97.864) 56.465,98.45 ; 56.465,98.45 cw(c56.465,99.036) 56.025,98.648 ccw(c56.465,99.036) 56.465,98.45 ; 56.465,98.45 57.15,97.765 ; 57.15,97.765 ccw(c56.212,96.827) 55.876,98.11 cw(c56.212,96.827) 57.15,97.765 ; 55.143,89.81 cw(c56.189,89.81) 55.45,90.549 ccw(c56.189,89.81) 55.143,89.81 ; 55.143,91.445 ccw(c56.189,91.445) 55.45,90.705 cw(c56.189,91.445) 55.143,91.445 ; C4.2@55.775,98.497 cw(c56.007,97.608) 56.657,98.258 ccw(c56.007,97.608) C4.2@55.775,98.497 ; 56.917,82.169 ccw(c56.917,83.153) 57.613,82.457 cw(c56.917,83.153) 56.917,82.169 ; 57.285,82.169 cw(c57.285,81.705) 57.613,82.033 ccw(c57.285,81.705) 57.285,82.169 ; 61.574,96.27 ccw(c60.66,97.184) 61.952,97.184 cw(c60.66,97.184) 61.574,96.27
  Top Layer w0.5: C3.2@69.266,98.45 68.453,98.45 68.174,98.171 68.174,95.86 68.707,95.326 69.342,95.326 70.002,94.666 70.002,82.118 ; 69.957,82.095 ccw(c70.394,82.348) 2.0*6P.6@70.501,81.854 ; 70.236,82.578 cw(c69.247,82.006) 2.0*6P.6@70.35,81.711 ; 68.662,98.45 ccw(c68.662,99.054) 69.089,98.627 cw(c68.662,99.054) 68.662,98.45 ; 68.662,98.45 cw(c68.662,97.846) 69.089,98.273 ccw(c68.662,97.846) 68.662,98.45 ; v1@69.681,90.559 cw(c68.904,89.782) 70.002,89.782 ccw(c68.904,89.782) v1@69.681,90.559 ; v1@69.681,90.644 ccw(c68.904,91.421) 70.002,91.421 cw(c68.904,91.421) v1@69.681,90.644 ; 70.002,82.241 ccw(c71.126,82.241) 70.331,81.447 cw(c71.126,82.241) 70.002,82.241 ; 70.002,83.448 ccw(c72.333,83.448) 70.685,81.8 cw(c72.333,83.448) 70.002,83.448
  Top Layer w0.6: C4.2@55.778,98.425 55.778,99.898 68.497,99.898 C1.2@69.266,100.667 C3.2@69.266,98.45 ; C2.2@55.852,100.424 cw(c56.147,99.321) 56.719,100.31 ; C2.2@55.999,100.594 ccw(c56.763,100.504) 56.378,99.837 ; C5.1@63.359,106.578 C6.2@63.359,108.483 ; C5.1@63.385,106.604 v1(64.465,106.604) ; 55.778,100.082 cw(c56.335,100.082) C2.2@55.941,100.476 ; 55.778,100.082 cw(c56.335,100.082) C2.2@55.941,100.476 ; 55.778,100.082 cw(c56.335,100.082) C2.2@55.941,100.476 ; 55.778,100.082 cw(c56.335,100.082) C2.2@55.941,100.476 ; C2.2@55.517,100.335 ccw(c56.571,101.388) 56.571,99.898 cw(c56.571,101.388) C2.2@55.517,100.335 ; 55.778,99.035 ccw(c56.335,99.035) 55.941,98.641 cw(c56.335,99.035) 55.778,99.035 ; C2.2@55.941,100.759 ccw(c58.019,102.837) 58.019,99.898 cw(c58.019,102.837) C2.2@55.941,100.759 ; C5.1@63.551,106.437 cw(c63.954,106.034) 63.954,106.604 ccw(c63.954,106.034) C5.1@63.551,106.437 ; C1.2@68.839,100.241 cw(c69.266,99.814) 69.266,100.417 ccw(c69.266,99.814) C1.2@68.839,100.241
  Top Layer w0.8: C7.2@66.941,82.231 69.889,82.231 ; 2.0*6P.6@70.536,79.959 70.536,81.585 69.889,82.231 ; 69.889,82.231 cw(c69.889,81.626) 70.494,81.656 ccw(c69.889,81.626) 69.889,82.231 ; 69.041,82.231 cw(c69.041,80.156) 70.508,81.624 ccw(c69.041,80.156) 69.041,82.231
  Bottom Layer w0.6: v1(64.465,99.974) v1(64.465,106.604)
  other v1: 44.933,79.07 69.723,90.602 55.372,90.627
LPMB: 
MOTO: 
OD: 
OUT1: 
OUT2: 
OUT3: 
OUT4: 
SM: 
TCH1: 
TCH2: 
TCH3: 
TCH4: 
TOG: UTouch4B.7
VC2: 